# EAGLE board Putri shaqila_driver (EAGLE 9.6.2)
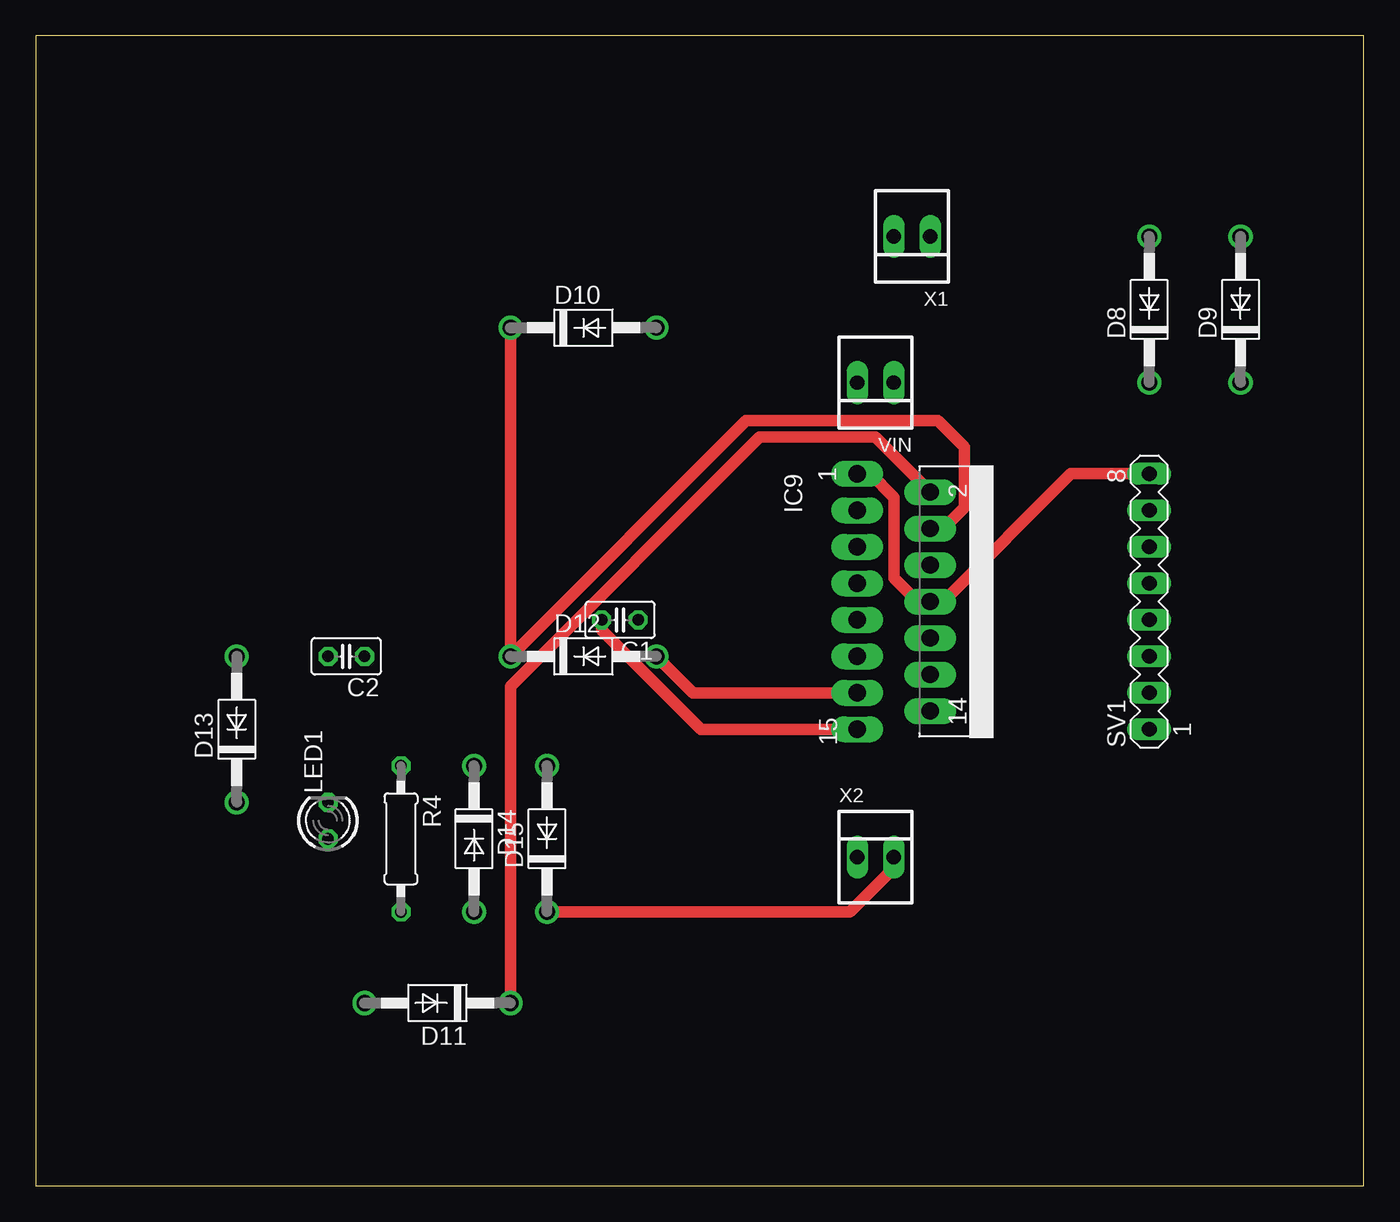
[diagram p0: board, top side]
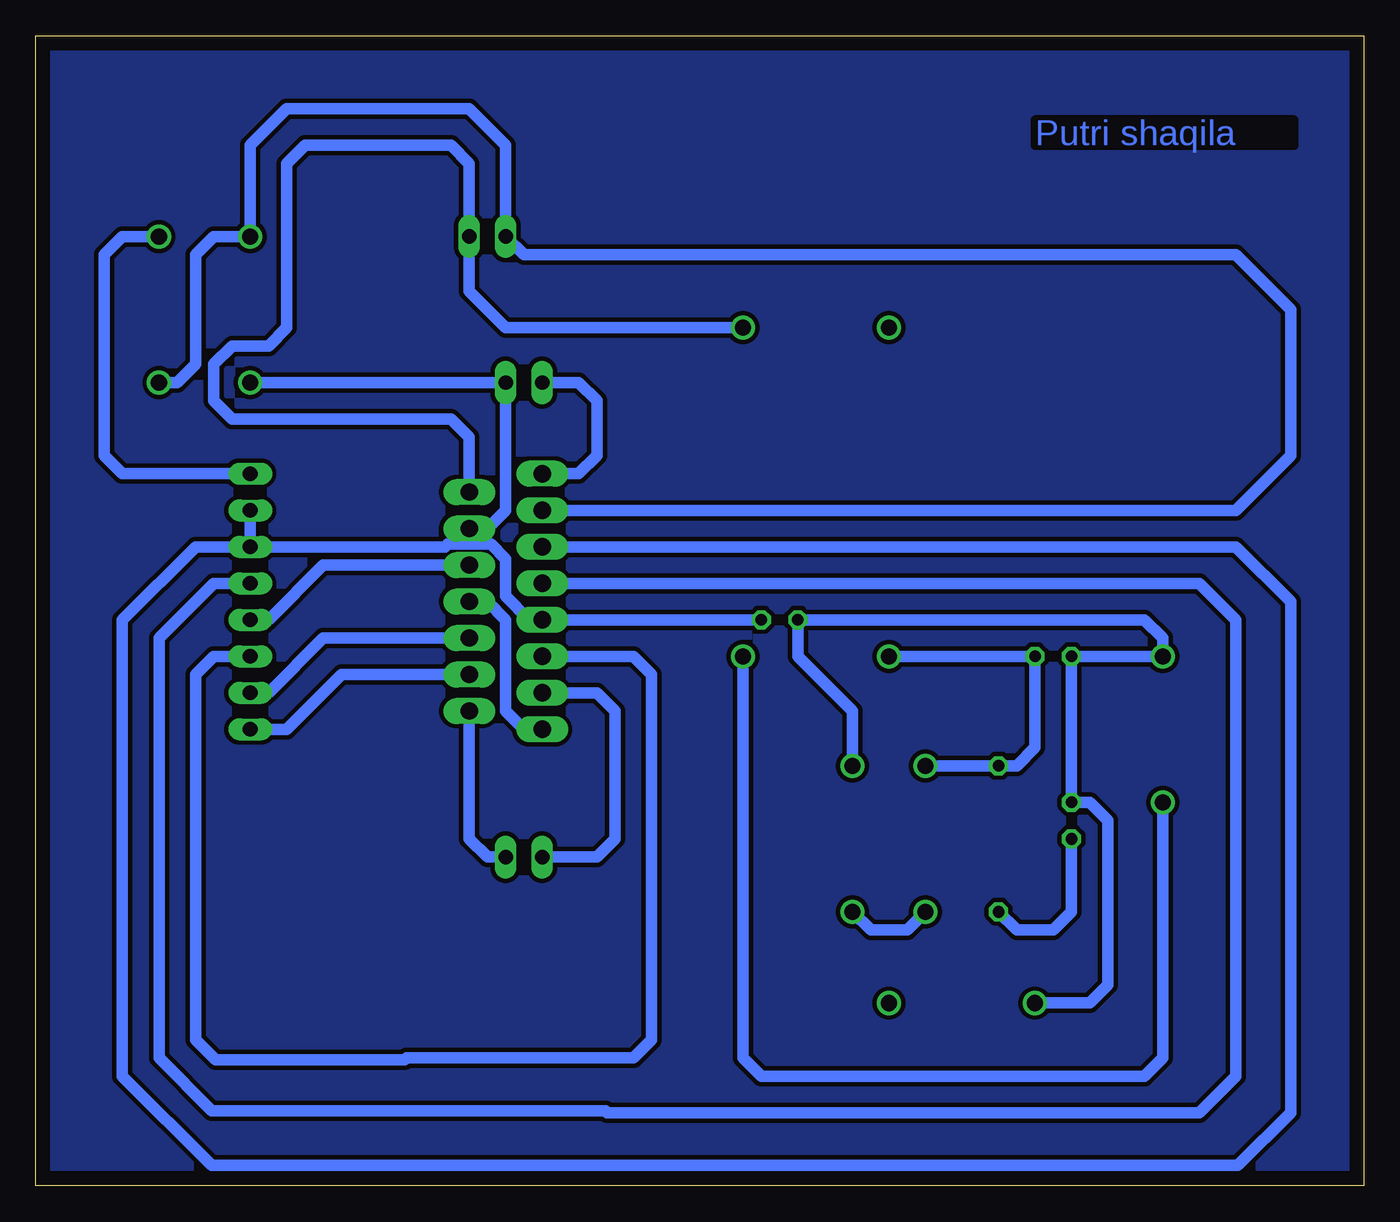
[diagram p1: board, bottom side, seen from below]

Size 92.38 x 80 mm. Coordinates in mm from the lower left corner, seen from the top.
Outline: 0,0 92.38,0 92.38,80 0,80 0,0
Copper layers (1*16): Top 0.035mm / dielectric 1.5mm / Bottom 0.035mm
Design rules "default": minimum track width 6mil, minimum drill 0.35mm, track to track 6mil, track to pad 6mil, pad to pad 6mil, via to via 6mil, smd to smd 6mil, copper to edge 40mil, drill to drill 6mil, minimum pad ring 10mil, minimum via ring 8mil, stop-mask expansion 4mil, vias tented up to drill 0mil, thermal gap 10mil

## Footprints (pad centres in the part's own frame; a part is rotated, then mirrored left to right if it is on the bottom)
C025-025X050 = drill 0.813 octagon: 1 -1.27,0; 2 1.27,0
DO41-10 = drill 1.118: A 5.08,0; C -5.08,0
MULTIWATT-15 = drill 1.2 long: 1 -8.89,-7.62; 2 -7.62,-2.54; 3 -6.35,-7.62; 4 -5.08,-2.54; 5 -3.81,-7.62; 6 -2.54,-2.54; 7 -1.27,-7.62; 8 0,-2.54; 9 1.27,-7.62; 10 2.54,-2.54; 11 3.81,-7.62; 12 5.08,-2.54; 13 6.35,-7.62; 14 7.62,-2.54; 15 8.89,-7.62
LED3MM = drill 0.813 octagon: A -1.27,0; K 1.27,0
0207/10 = drill 0.813 octagon: 1 -5.08,0; 2 5.08,0
MA08-1 = drill 1.016 long: 1 -8.89,0; 2 -6.35,0; 3 -3.81,0; 4 -1.27,0; 5 1.27,0; 6 3.81,0; 7 6.35,0; 8 8.89,0
22-23-2021 = drill 1 long: 1 -1.27,0; 2 1.27,0

## Placement (x,y rotation side)
C1  100nF  [C025-025X050]  40.64,39.37 180 top
C2  100nF  [C025-025X050]  21.59,36.83 180 top
D8  1N4004  [DO41-10]  77.47,60.96 90 top
D9  1N4004  [DO41-10]  83.82,60.96 90 top
D10  1N4004  [DO41-10]  38.1,59.69 0 top
D11  1N4004  [DO41-10]  27.94,12.7 180 top
D12  1N4004  [DO41-10]  38.1,36.83 0 top
D13  1N4004  [DO41-10]  13.97,31.75 90 top
D14  1N4004  [DO41-10]  30.48,24.13 270 top
D15  1N4004  [DO41-10]  35.56,24.13 90 top
IC9  L298  [MULTIWATT-15]  64.77,40.64 270 top
LED1  [LED3MM]  20.32,25.4 90 top
R4  330  [0207/10]  25.4,24.13 270 top
SV1  [MA08-1]  77.47,40.64 90 top
VIN  22-23-2021  [22-23-2021]  58.42,55.88 180 top
X1  22-23-2021  [22-23-2021]  60.96,66.04 180 top
X2  22-23-2021  [22-23-2021]  58.42,22.86 0 top

## Library data of the parts
C1 C2 R4 = rcl
D8-D15 = diode
IC9 = st-microelectronics
LED1 = led
SV1 = con-lstb; OC_FARNELL: unknown; OC_NEWARK: unknown
VIN X1 X2 = con-molex; MF: MOLEX; MPN: 22-23-2021; OC_FARNELL: 1462926; OC_NEWARK: 25C3832

## Nets
GND: C1.2 C2.2 D9.A D11.A D13.A D15.A IC9.1 IC9.8 IC9.15 LED1.K SV1.8 VIN.2
N$1: IC9.5 SV1.6
N$3: IC9.7 SV1.5
N$5: IC9.12 SV1.1
N$8: IC9.10 SV1.2
N$16: IC9.6 SV1.4
N$17: IC9.11 SV1.3
N$44: LED1.A R4.2
N$204: D8.A D9.C IC9.3 X1.2
N$205: D10.A D11.C IC9.2 X1.1
N$206: D12.A D13.C IC9.13 X2.1
N$207: D14.A D15.C IC9.14 X2.2
VCC: C1.1 IC9.9 SV1.7
VDD: C2.1 D8.C D10.C D12.C D14.C IC9.4 R4.1 VIN.1

## Tracks (layer width: path | path; a pad name or v marks a point on that pad's centre or on a via)
GND
  Top 0.813: IC9.1 58.05,49.53 59.69,47.89 59.69,42.28 61.33,40.64 IC9.8 63.13,40.64 72.02,49.53 SV1.8 | IC9.15 46.28,31.75 39.37,38.66 C1.2
  Bottom 0.813: VIN.2 54.61,55.88 53.34,54.61 53.34,50.8 54.61,49.53 IC9.1 | D9.A 86.36,66.04 87.63,64.77 87.63,50.8 86.36,49.53 SV1.8 | D11.A 19.05,12.7 17.78,13.97 17.78,25.4 19.05,26.67 LED1.K C2.2 D13.A 13.97,38.1 15.24,39.37 C1.2 39.37,36.83 35.56,33.02 D15.A | IC9.8 60.96,40.64 59.69,39.37 59.69,33.02 58.42,31.75 IC9.15
N$1
  Bottom 0.813: SV1.6 81.28,44.45 86.36,39.37 86.36,7.62 80.16,1.42 8.74,1.42 5.08,5.08 5.08,40.64 8.89,44.45 IC9.5
N$2
  pour Bottom (isolate 0.305): 0,80.01 0,0 92.71,0 92.71,80.01
N$3
  Bottom 0.813: SV1.5 80.01,41.91 83.82,38.1 83.82,8.89 80.14,5.21 52.76,5.21 52.63,5.08 11.43,5.08 8.89,7.62 8.89,39.37 11.43,41.91 IC9.7
N$5
  Bottom 0.813: SV1.1 74.93,31.75 71.12,35.56 IC9.12
N$8
  Bottom 0.813: SV1.2 76.2,34.29 72.39,38.1 IC9.10
N$16
  Bottom 0.813: SV1.4 76.2,39.37 72.39,43.18 IC9.6
N$17
  Bottom 0.813: SV1.3 80.01,36.83 81.28,35.56 81.28,10.16 79.88,8.76 66.73,8.76 66.6,8.89 50.8,8.89 49.53,10.16 49.53,35.56 50.8,36.83 IC9.11
N$44
  Bottom 0.813: R4.2 24.13,17.78 21.59,17.78 20.32,19.05 LED1.A
N$204
  Bottom 0.813: IC9.3 8.89,46.99 5.08,50.8 5.08,60.96 8.89,64.77 58.42,64.77 X1.2 59.69,72.39 62.23,74.93 74.93,74.93 77.47,72.39 D8.A 80.01,66.04 81.28,64.77 81.28,57.15 82.55,55.88 D9.C
N$205
  Top 0.813: IC9.2 58.42,52.07 50.35,52.07 33.02,34.74 D11.C
  Bottom 0.813: D10.A 59.69,59.69 62.23,62.23 X1.1 62.23,71.12 63.5,72.39 73.66,72.39 74.93,71.12 74.93,59.69 76.2,58.42 78.74,58.42 80.01,57.15 80.01,54.61 78.74,53.34 63.5,53.34 62.23,52.07 IC9.2
N$206
  Top 0.813: IC9.13 56.25,34.29 45.72,34.29 D12.A
  Bottom 0.813: X2.1 53.34,22.86 52.07,24.13 52.07,33.02 53.34,34.29 IC9.13 | D13.C 13.97,8.89 15.24,7.62 41.91,7.62 43.18,8.89 D12.A
N$207
  Top 0.813: X2.2 59.69,22.11 56.63,19.05 D15.C
  Bottom 0.813: X2.2 60.96,22.86 62.23,24.13 IC9.14 | D14.A 31.75,17.78 34.29,17.78 D15.C
VCC
  Bottom 0.813: C1.1 IC9.9 58.05,39.37 59.69,41.01 59.69,43.6 60.73,44.64 63.73,44.64 63.92,44.45 77.47,44.45 SV1.7
VDD
  Top 0.813: IC9.4 63.13,45.72 64.59,47.18 64.59,51.4 62.77,53.22 49.41,53.22 D12.C D10.C
  Bottom 0.813: IC9.4 60.96,45.72 59.69,46.99 VIN.1 D8.C | D12.C C2.1 22.86,30.48 24.13,29.21 R4.1 D14.C

## Text on the board
Bottom: Putri shaqila